# EAGLE board Platine_L6470 (EAGLE 6.2)
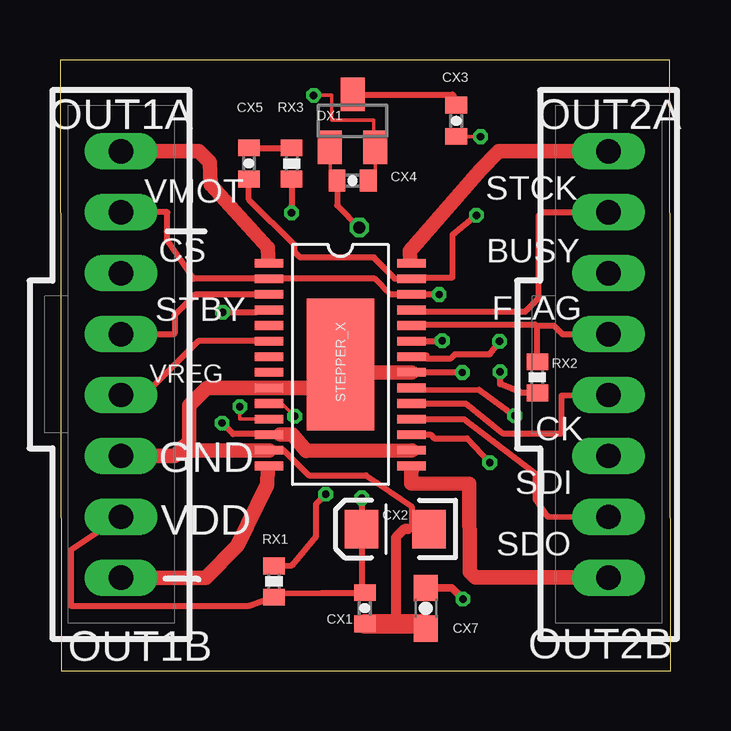
[diagram p0: board, top side]
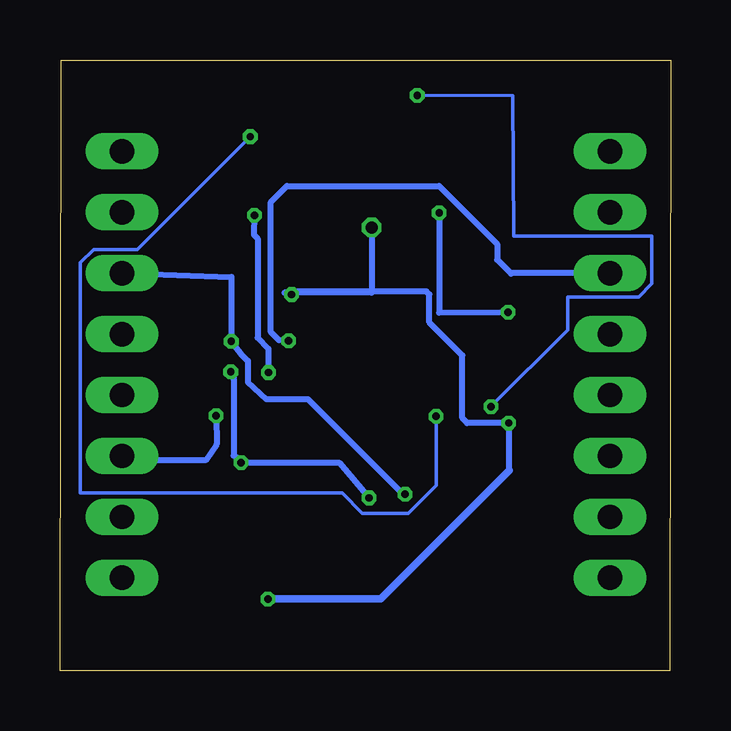
[diagram p1: board, bottom side, seen from below]

Size 25.45 x 25.48 mm. Coordinates in mm from the lower left corner, seen from the top.
Outline: 0.05,0 25.45,0 25.4,25.48 0,25.48 0.05,0
Copper layers (1*16): Top 0.035mm / dielectric 1.5mm / Bottom 0.035mm
Design rules: minimum track width 6mil, minimum drill 12mil, track to track 6mil, track to pad 6mil, pad to pad 6mil, via to via 6mil, smd to smd 0mil, copper to edge 10mil, drill to drill 10mil, minimum pad ring 10mil, minimum via ring 6mil, stop-mask expansion 2mil, vias tented up to drill 100mil, thermal gap 10mil

## Footprints (pad centres in the part's own frame; a part is rotated, then mirrored left to right if it is on the bottom)
0402-CAP = smd 0.7 x 0.9: 1 -0.65,0; 2 0.65,0
EIA3216 = smd 1.4 x 1.6: A 1.4,0; C -1.4,0
0603-CAP = smd 1.1 x 1: 1 -0.85,0; 2 0.85,0
SOT23 = smd 1 x 1.4: 1 -0.95,-1.1; 2 0.95,-1.1; 3 0,1.1
0402-RES = smd 0.7 x 0.9: 1 -0.65,0; 2 0.65,0
HTSSOP28 = smd 0.36 x 1.19: 1 -4.225,-2.97; 2 -3.575,-2.97; 3 -2.925,-2.97; 4 -2.275,-2.97; 5 -1.625,-2.97; 6 -0.975,-2.97; 7 -0.325,-2.97; 8 0.325,-2.97; 9 0.975,-2.97; 10 1.625,-2.97; 11 2.275,-2.97; 12 2.925,-2.97; 13 3.575,-2.97; 14 4.225,-2.97; 15 4.225,2.97; 16 3.575,2.97; 17 2.925,2.97; 18 2.275,2.97; 19 1.625,2.97; 20 0.975,2.97; 21 0.325,2.97; 22 -0.325,2.97; 23 -0.975,2.97; 24 -1.625,2.97; 25 -2.275,2.97; 26 -2.925,2.97; 27 -3.575,2.97; 28 -4.225,2.97 | smd 5.5 x 2.8: 29 0,0
70543-08 = drill 1.016 long: 1 -8.89,0; 2 -6.35,0; 3 -3.81,0; 4 -1.27,0; 5 1.27,0; 6 3.81,0; 7 6.35,0; 8 8.89,0

## Placement (x,y rotation side)
CX1  0.1uF  [0402-CAP]  12.7,2.62 270 top
CX2  10uF  [EIA3216]  13.97,5.92 180 top
CX3  10nF  [0402-CAP]  16.51,22.94 270 top
CX4  10nF  [0402-CAP]  12.19,20.45 180 top
CX5  10nF  [0402-CAP]  7.87,21.16 270 top
CX7  0.22uF  [0603-CAP]  15.24,2.62 270 top
DX1  BAV99  [SOT23]  12.19,22.94 0 top
RX1  10k  [0402-RES]  8.92,3.73 270 top
RX2  10k  [0402-RES]  19.89,12.24 270 top
RX3  100  [0402-RES]  9.65,21.16 90 top
STEPPER_X  L6470  [HTSSOP28]  11.68,12.78 270 top
X1  C-GRID-08-70543  [70543-08]  2.54,12.78 270 top
X2  C-GRID-08-70543  [70543-08]  22.86,12.78 270 top

## Library data of the parts
CX1-CX5 CX7 RX1-RX3 = SparkFun
DX1 STEPPER_X = miscellany
X1 X2 = con-molex; OC_FARNELL: unknown; OC_NEWARK: unknown

## Nets
BUSYN: RX1.1 STEPPER_X.22 X2.3
CK: STEPPER_X.19 X2.5
CSN: STEPPER_X.23 X1.3
FLAGN: RX2.1 STEPPER_X.24 X2.4
GND: CX1.2 CX2.C CX5.2 CX7.2 STEPPER_X.9 STEPPER_X.13 STEPPER_X.21 STEPPER_X.27 STEPPER_X.29 X1.6
N$6: CX3.2 STEPPER_X.10
N$8: CX3.1 DX1.3
N$9: CX4.1 DX1.2 STEPPER_X.11
N$10: RX3.1 STEPPER_X.4
OUT1A: STEPPER_X.1 X1.1
OUT1B: STEPPER_X.14 X1.8
OUT2A: STEPPER_X.28 X2.1
OUT2B: STEPPER_X.15 X2.8
SDI: STEPPER_X.20 X2.6
SDO: STEPPER_X.18 X2.7
STANDBY: STEPPER_X.3 X1.4
STCK: STEPPER_X.25 X2.2
SW: CX5.1 RX3.2
VDD: CX1.1 CX2.A RX1.2 RX2.2 STEPPER_X.17 X1.7
VMOT: CX4.2 CX7.1 DX1.1 STEPPER_X.2 STEPPER_X.12 STEPPER_X.16 STEPPER_X.26 X1.2
VREG: STEPPER_X.6 X1.5

## Tracks (layer width: path | path; a pad name or v marks a point on that pad's centre or on a via)
BUSYN  (via drill 0.3)
  Top 0.254: STEPPER_X.22 15.27,13.16 15.27,13.03 16.28,13.03 16.46,13.21 17.91,13.21 18.21,13.61 v18.31,13.74 | RX1.1 9.67,4.41 10.67,5.61 10.67,6.96 v11.07,7.37
  Bottom 0.254: X2.3 18.31,16.43 v18.31,13.74 17.88,13.18 17.63,12.93 17.63,12.04 16.84,11.33 15.11,11.33 11.15,7.37 v11.07,7.37
CK
  Top 0.254: STEPPER_X.19 16.92,11.15 18.44,9.91 20.9,9.91 20.9,11.48 22.83,11.53 X2.5
CSN  (via drill 0.3)
  Top 0.254: STEPPER_X.23 16.06,13.75 v15.93,13.77
  Bottom 0.254: v15.93,13.77 16.33,13.79 16.66,14.12 16.66,19.56 16,20.22 9.65,20.22 7.24,17.81 7.24,17.15 6.65,16.56 6.63,16.59 X1.3
FLAGN
  Top 0.254: STEPPER_X.24 15.06,14.4 15.11,14.45 19.79,14.45 19.86,14.38 19.89,14.4 | 19.89,14.4 20.57,14.4 20.93,14.05 X2.4 | RX2.1 19.89,14.4
GND  (via drill 0.3)
  Top 0.254: 5.02,9.2 5.02,9.21 | CX2.C 14.5,5.92 14.66,5.94 14.66,6.86 12.75,8.15 10.36,8.15 9.32,9.2 STEPPER_X.13 | CX5.2 7.87,19.66 9.78,17.75 9.78,17.48 10.01,17.25 13.08,17.25 13.98,16.35 STEPPER_X.27 15.18,16.35 15.24,16.41 16.36,16.41 16.36,18.19 v17.35,19 | v16.76,12.45 STEPPER_X.21
  Top 0.406: 14.5,5.92 14.35,5.92 14,5.56 14,1.97
  Top 0.61: STEPPER_X.21 12.01,12.45 STEPPER_X.29 10.71,11.8 STEPPER_X.9 6.11,11.8 5.38,11.07 5.38,9.58 5.02,9.21 4.78,8.97 X1.6 | STEPPER_X.13 5.02,9.2
  Top 0.813: CX1.2 14,1.97 15.04,1.97 CX7.2
  Bottom 0.254: v17.35,19 17.37,18.19 17.22,18.03 17.22,13.89 16.76,13.44 v16.76,12.45 16.76,12.37
  Bottom 0.406: 16.76,12.37 v16.76,12.45
N$6  (via drill 0.3)
  Top 0.152: v17.53,22.28 CX3.2 | v9.78,10.62 9.25,11.15 8.74,11.15 STEPPER_X.10
  Bottom 0.152: v17.53,22.28 22.22,17.58 24.05,17.58 24.61,17.02 24.61,7.42 13.69,7.42 12.85,6.58 10.95,6.58 9.78,7.75 v9.78,10.62
N$8
  Top 0.254: DX1.3 16.36,24.03 CX3.1
N$9  (via drill 0.3)
  Top 0.152: CX4.1 13.13,20.73 13.13,21.82 DX1.2 13.08,21.84 13.08,22.96 11.33,22.96 11.33,24 v10.57,24 | v7.49,11.02 7.49,10.52 STEPPER_X.11
  Bottom 0.152: v7.49,11.02 4.29,14.22 4.29,15.6 1.35,15.6 0.79,16.15 0.79,18.14 6.55,18.14 6.58,23.98 v10.57,24
N$10  (via drill 0.3)
  Top 0.254: RX3.1 v9.65,19.1 | v6.78,14.96 8.18,14.96 8.27,15.05 STEPPER_X.4
  Bottom 0.254: v9.65,19.1 9.65,14.94 v6.78,14.96
OUT1A
  Top 0.305: STEPPER_X.1 8.68,17.26
  Top 0.61: 8.68,17.26 8.66,17.65 6.27,20.27 6.25,21.21 5.79,21.67 X1.1
OUT1B
  Top 0.305: STEPPER_X.14 8.65,8.42
  Top 0.61: 8.65,8.42 8.64,7.77 7.39,5.21 6.07,3.89 X1.8
OUT2A
  Top 0.305: STEPPER_X.28 14.59,17.1
  Top 0.61: 14.59,17.1 14.58,17.5 17.5,20.88 18.29,21.67 X2.1
OUT2B
  Top 0.305: STEPPER_X.15 14.65,8.36
  Top 0.61: 14.65,8.36 14.63,8.33 14.64,7.81 17.04,7.8 17.07,4.14 17.3,3.91 22.83,3.91 X2.8
SDI  (via drill 0.3)
  Top 0.254: STEPPER_X.20 15.05,11.8 14.94,11.74 17.46,11.73 v18.95,10.64
  Bottom 0.254: v18.95,10.64 18.92,9.45 19.38,8.79 22.68,8.79 X2.6
SDO
  Top 0.254: STEPPER_X.18 16.83,10.5 19.81,8.23 19.81,7.16 20.29,6.45 X2.7
STANDBY
  Top 0.254: STEPPER_X.3 5.64,15.7 4.78,14.83 4.78,14.07 4.75,14.05 X1.4
STCK
  Top 0.254: STEPPER_X.25 15.12,15.05 15.19,14.99 19.38,14.99 19.94,15.55 19.94,18.97 20.09,19.13 X2.2
SW
  Top 0.254: CX5.1 RX3.2
VDD  (via drill 0.3, 0.3 pad 0.25)
  Top 0.254: v12.57,7.21 12.57,6.02 CX2.A 12.57,3.4 CX1.1 12.68,3.25 10.9,3.25 8.9,3.24 RX1.2 7.87,2.72 0.46,2.72 0.46,5.03 X1.7 | v17.91,8.69 16.97,9.7 15.6,9.7 15.44,9.86 STEPPER_X.17 | RX2.2 19.27,11.59 18.34,11.96 v18.34,12.47
  Bottom 0.254: v12.57,7.21 13.82,8.69 v17.91,8.69 17.65,8.69 18.21,8.97 18.21,12.17 v18.34,12.47
VMOT  (via drill 0.3, 0.5 pad 0.25)
  Top 0.152: CX4.2 11.53,20.45 11.25,20.73 11.25,21.82 DX1.1
  Top 0.254: STEPPER_X.2 13.11,16.36 13.76,15.7 STEPPER_X.26 v15.8,15.7 | STEPPER_X.2 | 9.18,9.86 STEPPER_X.12 | STEPPER_X.2 5.56,16.36 4.47,17.96 4.47,19.13 X1.2 | CX4.2 11.54,19.42 v12.47,18.49 | 8.68,9.88 7.21,9.88 v6.76,10.34
  Top 0.305: CX7.1 16.32,3.47 v16.79,3 | 6.76,10.47 v6.76,10.34 | 8.68,9.88 STEPPER_X.12
  Top 0.61: STEPPER_X.16 10.26,9.18 9.68,9.86 9.18,9.86
  Bottom 0.254: v12.47,18.49 12.47,15.77 16.1,15.77 v15.8,15.7 15.67,15.82 10.19,15.82 10.06,15.7 10.06,14.53 8.69,13.16 8.69,10.54 8.48,10.34 v6.76,10.34 6.73,10.31 6.73,8.36
  Bottom 0.305: v16.79,3 12.09,3 6.73,8.36
VREG
  Top 0.254: STEPPER_X.6 5.75,13.75 3.51,11.51 X1.5

## Text on the board
tPlace: OUT1A | OUT2A | VMOT | STCK | CS | BUSY | STBY | FLAG | VREG | CK | GND | SDI | VDD | SDO | OUT1B | OUT2B